# Altium PCB FOC.PcbDoc
Units mil, origin at the board's own origin, x right, y up, seen from the top; angles counter-clockwise.
Board outline 3535.01 x 1960.01 mil, 2 copper layers (Top Layer, Bottom Layer), stack 21 mil thick; 64 components, 47 nets, 230 pads, 98 vias.
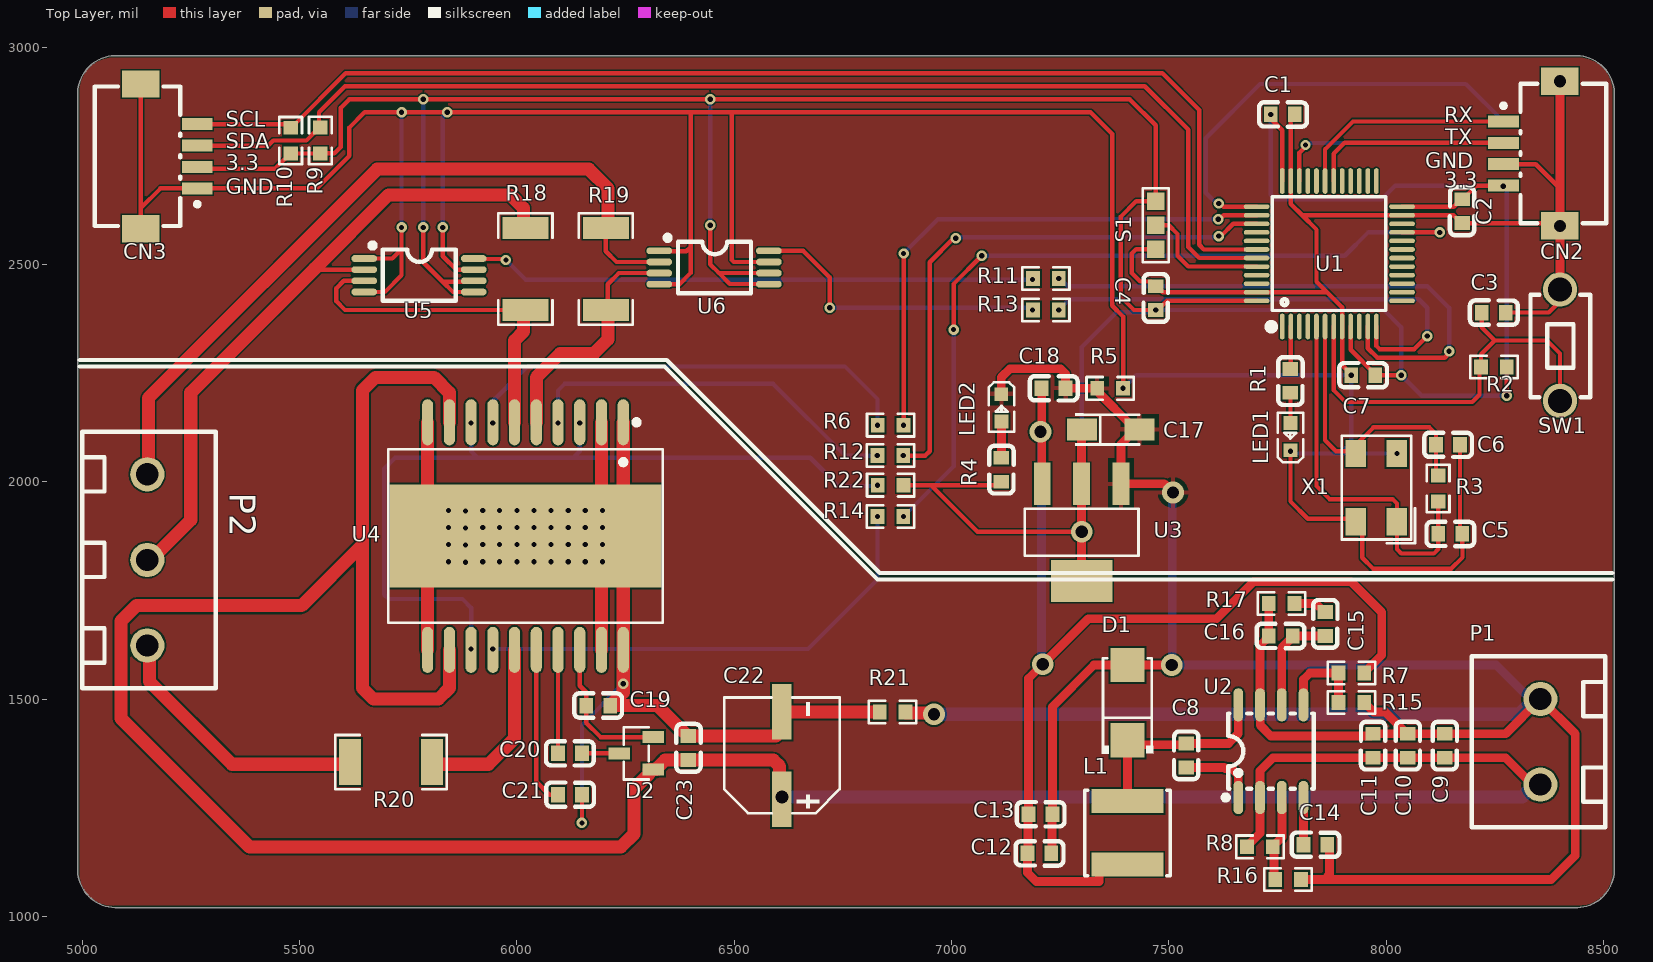
[diagram p0: Top Layer view]
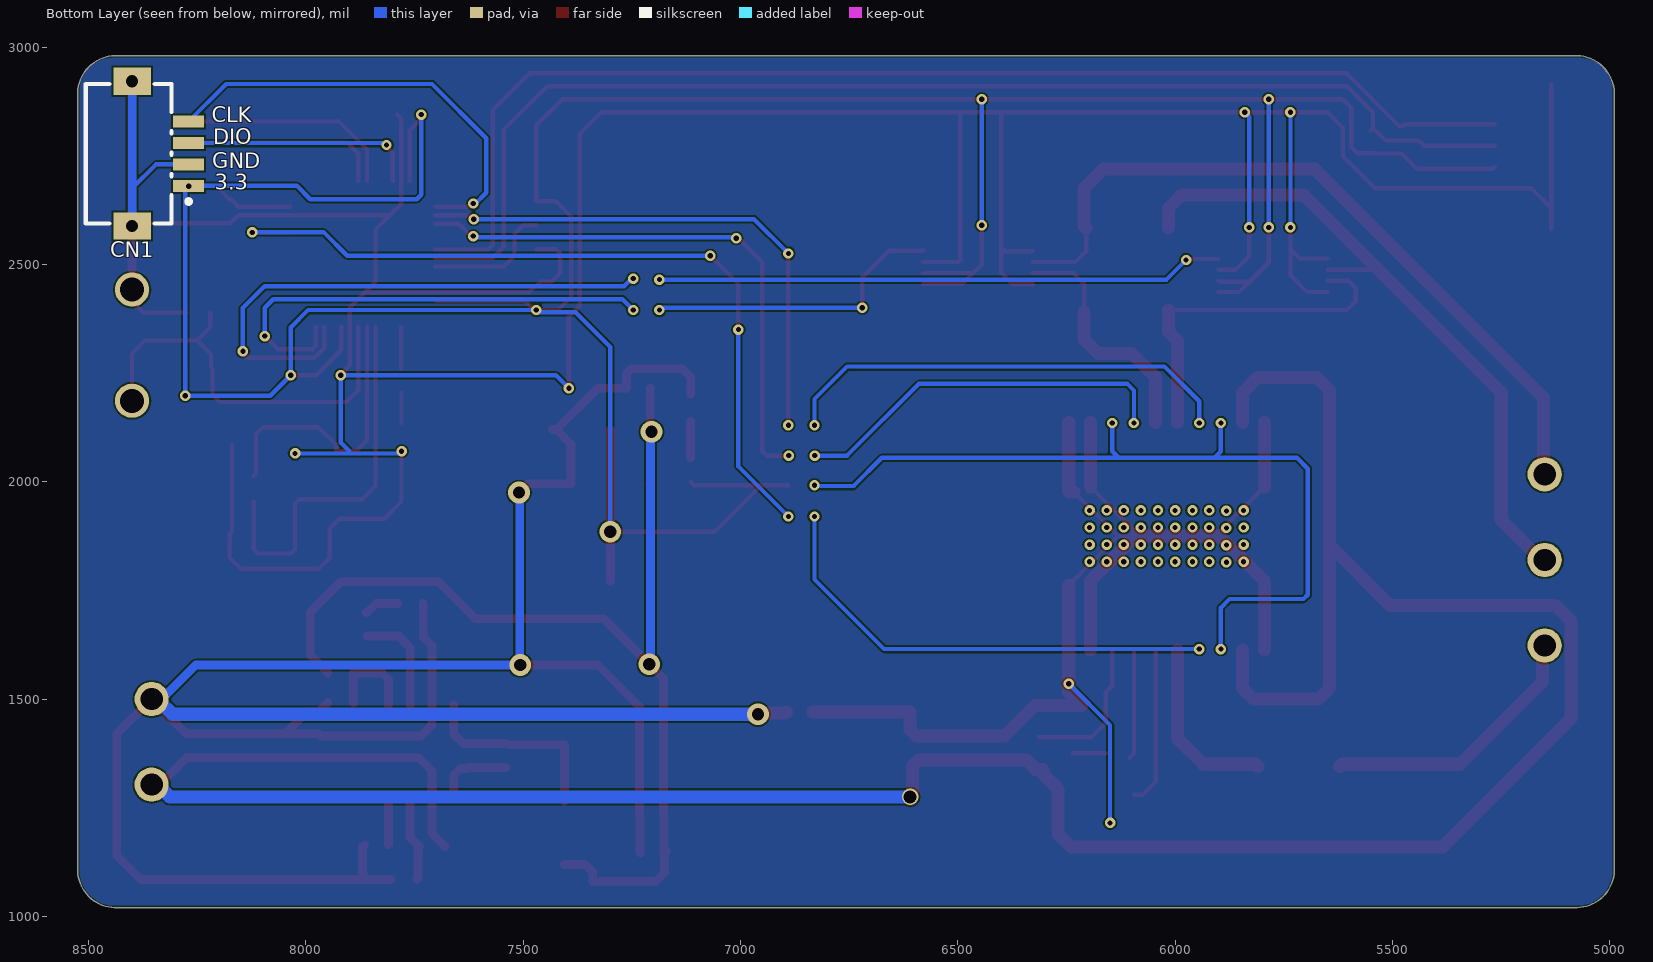
[diagram p1: Bottom Layer view, seen from below]

## Layer stack, top to bottom
Top Solder: solder mask 0.4, Solder Resist, Dk 3.5
Top Layer: signal copper 1.4
Dielectric 2: prepreg 2.8, PP-006, Dk 4.1
Dielectric 1: dielectric 12.6, FR-4, Dk 4.8
Dielectric 3: prepreg 2.8, PP-006, Dk 4.1
Bottom Layer: signal copper 1.4
Bottom Solder: solder mask 0.4, Solder Resist, Dk 3.5

## Board outline
4989.99,1105.01 4989.99,2894.74 cw(c5077.5,2892.5) 5075,2980 5075.01,2980.01 8439.74,2980.01 cw(c8437.5,2892.5) 8525,2895 8525.01,2894.99 8525.01,1105.26 cw(c8437.5,1107.5) 8440,1020 8439.99,1019.99 5075.26,1019.99 cw(c5077.5,1107.5)

## Design rules (kind name [scope] priority, off if disabled: settings)
Clearance [All] p1: gap=4 ignorepadtopadclearanceinfootprint=TRUE
PolygonConnect [All] p1: connectstyle=Relief reliefconductorwidth=10 reliefentries=4 polygonreliefangle="90 Angle" airgapwidth=10
RoutingVias [All] p1: holewidth=10 width=20 viastyle="Through Hole" minholewidth=10 minwidth=10 maxholewidth=28 maxwidth=50
SolderMaskExpansion [All] p1: expansion=4
Width [All] p1: maxlimit=100 minlimit=10 preferedwidth=10 minimp=50.000000 maximp=50.000000 favimp=50.000000
30 further rules are at their usual default settings.

## Classes and differential pairs
component class M_FOC: C19 C20 C21 C22 C23 D2 P2 R18 R19 R20 R21 U4 U5 U6
component class FOC: C1 C2 C3 C4 C5 C6 C7 C8 C9 C10 C11 C12 C13 C14 C15 C16 C17 C18 CN1 CN2 CN3 D1 L1 LED1 LED2 P1 R1 R2 R3 R4 R5 R6 R7 R8 R9 R10 R11 R12 R13 R14 R15 R16 R17 R22 S1 SW1 U1 U2 U3 X1

## Components (designator, comment, footprint, x,y, rotation, side; value= is the part's Value field where it differs from the comment)
C1 "22nF" C0603 7762.44,2845 r180 top
C2 "22nF" C0603 8175,2622.55 r90 top
C3 "22nF" C0603 8247.56,2389.14 r180 top
C4 "22nF" C0603 7470,2422.45 r270 top
C5 "22pF" C0603 8147.66,1879.89 r180 top
C6 "22pF" C0603 8142.56,2085 r180 top
C7 "22nF" C0603 7947.56,2245 r0 top
C8 "100nF" C0603 7540,1370 r270 top
C9 "4.7uF" C0603 8135,1392.56 r270 top
C10 "4.7uF" C0603 8050,1392.44 r270 top
C11 "100nF" C0603 7970,1392.56 r270 top
C12 "22uF" C0603 7202.44,1145 r180 top
C13 "22uF" C0603 7205,1235 r180 top
C14 "100nF" C0603 7837.44,1165 r180 top
C15 "1.2nF" C0603 7860.13,1672.56 r270 top
C16 "10pF" C0603 7757.44,1645 r0 top
C17 "10uF" CAP-SMD_L3.2-W1.6-RD 7366.39,2120 r180 top
C18 "10nF" C0603 7235,2215 r180 top
C19 "220nF" C0603 6187.44,1485 r0 top
C20 "10nF" C0603 6122.56,1374.89 r0 top
C21 "1uF" C0603 6122.44,1280 r180 top
C22 "100uF" CAP-SMD_BD6.3-L6.6-W6.6-RD 6610,1370 r270 top
C23 "100nF" C0603 6395,1387.44 r270 top
CN1 "GH1.25_4P" CONN-TH_4P-P1.25_HRS_DF13-4P-1.25H-21 8334.96,2754.6 r90 bottom
CN2 "GH1.25_4P" CONN-TH_4P-P1.25_HRS_DF13-4P-1.25H-21 8335,2755 r270 top
CN3 "GH1.25_4P" CONN-TH_4P-P1.25_HRS_DF13-4P-1.25H-21 5199.96,2748.66 r90 top
D1 "SS36" SMA_L4.3-W2.6-LS5.2-RD 7405,1491.62 r90 top
D2 "BAT54S_C916425" SOT-23-3_L2.9-W1.3-P1.90-LS2.4-BR 6275,1375 r0 top
L1 "6.8uH" IND-SMD_L5.0-W5.0_SWPA5040S 7404.99,1192.16 r270 top
LED1 "SML-D12U8WT86" LED0603-RD 7780.14,2103.52 r90 top
LED2 "SML-D12U8WT86" LED0603-RD 7115,2170 r270 top
P1 "WJ126V-5.0-2P" CONN-TH_WJ126V-5.0-2P 8355,1401.55 r180 top
P2 "WJ126V-5.0-3P" CONN-TH_3P-P5.00_WJ126V-5.0-3P 5150,1820.05 r90 top
R1 "330" C0603 7780,2231.96 r90 top
R2 "10K" R0603 8248.04,2264.14 r180 top
R3 "10K" R0603 8119.94,1984.29 r90 top
R4 "330" C0603 7115,2027.44 r270 top
R5 "0" R0603 7365.35,2215 r180 top
R6 "0" R0603 6860.35,2130 r0 top
R7 "62K" R0603 7920.35,1560 r0 top
R8 "330K" R0603 7709.65,1160 r180 top
R9 "10K" R0603 5548.03,2785 r270 top
R10 "10K" R0603 5480,2784.66 r270 top
R11 "0" R0603 7217.22,2467.25 r0 top
R12 "0" R0603 6859.65,2060 r0 top
R13 "0" R0603 7217.22,2395 r0 top
R14 "0" R0603 6859.65,1920 r0 top
R15 "10K" R0603 7920.35,1491.91 r180 top
R16 "68K" R0603 7774.65,1085 r180 top
R17 "30K" R0603 7759.64,1720 r0 top
R18 "0.1" R2010 6020,2489.14 r90 top
R19 "0.1" R2010 6205,2489.14 r90 top
R20 "0.1" R2010 5710.86,1355 r0 top
R21 "0" R0603 6864.65,1470 r0 top
R22 "0" R0603 6860.35,1991.97 r0 top
S1 "switch" switch 7470,2590 r90 top
SW1 "UK" SW-TH_L6.0-W3.5-P6.50 8400,2314.14 r90 top
U1 "STM32F103C8T6" LQFP-48_L7.0-W7.0-P0.50-LS9.0-BL 7869.43,2524.43 r0 top
U2 "TPS54331DR" SOIC-8_L5.0-W4.0-P1.27-LS6.0-BL 7735,1380 r0 top
U3 "AMS1117-3.3_C369933" SOT-223-4_L6.5-W3.5-P2.30-LS7.0-BR 7299.45,1883.39 r90 top
U4 "L6234PD013TR" POWERSO20_L15.9-W11.0-P1.27-LS14.2-BL-EP 6020,1875 r180 top
U5 "INA240A3PWR" TSSOP-8_L4.4-W3.0-P0.65-LS6.4-BL-2 5775,2475 r270 top
U6 "INA240A3PWR" TSSOP-8_L4.4-W3.0-P0.65-LS6.4-BL-2 6454,2492.8 r270 top
X1 "8MHz" CRYSTAL-SMD_4P-L5.0-W3.2-BL 7977.76,1986.26 r90 top

## Footprints (in the part's own frame and the unit in brackets; to place one, negate y for a bottom-side part, rotate by r counter-clockwise, add the part's x,y. Pads: shape width x height; smd on the part's side, far side on the other; paste and mask are expansions set on the pad)
C0603 [mm]
  rect 0.8x0.9 smd: 1(-0.7,0) 2(0.7,0)
  silkscreen extent -1.41,-0.71 1.39,0.72
CAP-SMD_BD6.3-L6.6-W6.6-RD [mm]
  rect 3.26x1.15 smd: 1(2.555,0) 2(-2.555,0)
  silkscreen extent -3.39,-3.38 3.36,3.38
CAP-SMD_L3.2-W1.6-RD [mil]
  rect 69.19x51.02 smd: 1(66.39,0) 2(-66.39,0)
  silkscreen extent -66,-37 81,37
CONN-TH_3P-P5.00_WJ126V-5.0-3P [mm]
  round 2 hole 1.3: 1(5,0) 2(-0.001,0) 3(-5,0)
  silkscreen extent -7.5,-4 7.5,3.8
CONN-TH_4P-P1.25_HRS_DF13-4P-1.25H-21 [mm]
  rect 0.7x1.8 smd: 1(-1.875,-1.65) 2(-0.625,-1.65) 3(0.625,-1.65) 4(1.875,-1.65)
  rect 1.6x2.2 smd: 5(4.225,1.65) 6(-4.225,1.65)
  silkscreen extent -4.07,-1.78 4.07,4.35
CONN-TH_WJ126V-5.0-2P [mm]
  round 2 hole 1.3: 1(0,2.501) 2(0,-2.501)
  silkscreen extent -3.8,-5 4,5
CRYSTAL-SMD_4P-L5.0-W3.2-BL [mm]
  rect 1.6x1.2 smd: 1(-2,-1.2) 2(2,-1.2) 3(2,1.2) 4(-2,1.2)
  silkscreen extent -3.26,-2.26 3.03,2.03
IND-SMD_L5.0-W5.0_SWPA5040S [mm]
  rect 1.4x4.2 smd: 1(-1.85,0) 2(1.85,0)
  silkscreen extent -2.5,-2.5 2.5,2.5
LED0603-RD [mm]
  rect 0.8x0.8 smd: 1(-0.799,-0.003) 2(0.799,0.004)
  silkscreen extent -1.49,-0.75 1.39,0.76
LQFP-48_L7.0-W7.0-P0.50-LS9.0-BL [mm]
  oval 0.27x1.5 smd: 1(-2.75,-4.25) 2(-2.25,-4.25) 3(-1.75,-4.25) 4(-1.25,-4.25) 5(-0.75,-4.25) 6(-0.25,-4.25) 7(0.25,-4.25) 8(0.75,-4.25) 9(1.25,-4.25) 10(1.75,-4.25) 11(2.25,-4.25) 12(2.75,-4.25) 25(2.75,4.25) 26(2.25,4.25) 27(1.75,4.25) 28(1.25,4.25) 29(0.75,4.25) 30(0.25,4.25) 31(-0.25,4.25) 32(-0.75,4.25) 33(-1.25,4.25) 34(-1.75,4.25) 35(-2.25,4.25) 36(-2.75,4.25)
  oval 1.5x0.27 smd: 13(4.25,-2.75) 14(4.25,-2.25) 15(4.25,-1.75) 16(4.25,-1.25) 17(4.25,-0.75) 18(4.25,-0.25) 19(4.25,0.25) 20(4.25,0.75) 21(4.25,1.25) 22(4.25,1.75) 23(4.25,2.25) 24(4.25,2.75) 37(-4.25,2.75) 38(-4.25,2.25) 39(-4.25,1.75) 40(-4.25,1.25) 41(-4.25,0.75) 42(-4.25,0.25) 43(-4.25,-0.25) 44(-4.25,-0.75) 45(-4.25,-1.25) 46(-4.25,-1.75) 47(-4.25,-2.25) 48(-4.25,-2.75)
  silkscreen extent -3.59,-4.46 3.3,3.34
POWERSO20_L15.9-W11.0-P1.27-LS14.2-BL-EP [mm]
  oval 0.651x2.694 smd: 1(-5.715,-6.648) 2(-4.445,-6.648) 3(-3.175,-6.648) 4(-1.905,-6.648) 5(-0.635,-6.648) 6(0.635,-6.648) 7(1.905,-6.648) 8(3.175,-6.648) 9(4.445,-6.648) 10(5.715,-6.648) 11(5.715,6.648) 12(4.445,6.648) 13(3.175,6.648) 14(1.905,6.648) 15(0.635,6.648) 16(-0.635,6.648) 17(-1.905,6.648) 18(-3.175,6.648) 19(-4.445,6.648) 20(-5.715,6.648)
  rect 15.9x6 smd: 21(0,0)
  silkscreen extent -8.03,-6.8 8.03,5.07
R0603 [mil]
  rect 31.75x34.02 smd: 1(-29.66,0) 2(29.65,0)
  silkscreen extent -55,-26 55,26
R2010 [mm]
  rect 1.283x2.7 smd: 1(-2.391,0) 2(2.391,0)
  silkscreen extent -3.26,-1.58 3.26,1.58
SMA_L4.3-W2.6-LS5.2-RD [mm]
  rect 2x2 smd: 1(-2.2,0) 2(2.2,0)
  silkscreen extent -2.98,-1.5 2.6,1.5
SOIC-8_L5.0-W4.0-P1.27-LS6.0-BL [mil]
  oval 22.38x76.78 smd: 1(-75,-106.5) 2(-25,-106.5) 3(25,-106.5) 4(75,-106.5) 5(75,106.5) 6(25,106.5) 7(-25,106.5) 8(-75,106.5)
  silkscreen extent -110,-112 98,87
SOT-23-3_L2.9-W1.3-P1.90-LS2.4-BR [mm]
  rect 1.25x0.7 smd: 1(1,-0.95) 2(1,0.95) 3(-1,0)
  silkscreen extent -0.73,-1.53 0.73,1.53
SOT-223-4_L6.5-W3.5-P2.30-LS7.0-BR [mm]
  rect 2.47x0.98 smd: 1(2.835,-2.3) 2(2.835,0) 3(2.835,2.3)
  rect 2.47x3.6 smd: 4(-2.835,0)
  silkscreen extent -1.37,-3.33 1.37,3.33
SW-TH_L6.0-W3.5-P6.50 [mm]
  round 2 hole 1.4: 1(-3.25,0) 2(3.25,0)
  silkscreen extent -3.05,-1.78 2.95,1.72
switch [mil]
  rect 40x40 smd: 0(0,0) 1(-55,0) 2(55,0)
  silkscreen extent -85,-30 85,30
TSSOP-8_L4.4-W3.0-P0.65-LS6.4-BL-2 [mm]
  oval 0.4x1.5 smd: 1(-0.975,-3.2) 2(-0.325,-3.2) 3(0.325,-3.2) 4(0.975,-3.2) 5(0.975,3.2) 6(0.325,3.2) 7(-0.325,3.2) 8(-0.975,3.2)
  silkscreen extent -1.89,-2.87 1.5,2.16

## Part data
C1 C2 C3 C4 C5 C6 C7 C8 C9 C10 C11 C12 C13 C14 C15 C16 C18 C19 C20 C21 C23: BOM_JLCPCB Part Class="Basic Part", BOM_Manufacturer=YAGEO, BOM_Manufacturer Part=CC0805KRX7R9BB104, BOM_Supplier=LCSC, BOM_Supplier Part=C49678, nameAlias=Capacitance, spicePre=C, spiceSymbolName=CC0805KRX7R9BB104
C17: "tan", BOM_JLCPCB Part Class="Extended Part", BOM_Manufacturer=Xiangyee, BOM_Manufacturer Part=CA45-A016K106T, BOM_Supplier=LCSC, BOM_Supplier Part=C119051, Contributor=LCSC, nameAlias=Capacitance, spicePre=C, spiceSymbolName=CA45-A016K106T
C22: "电解电容", BOM_JLCPCB Part Class="Extended Part", BOM_Manufacturer=ROQANG, BOM_Manufacturer Part=RVE1V101M0607, BOM_Supplier=LCSC, BOM_Supplier Part=C99837, nameAlias=Capacitance, spicePre=C, spiceSymbolName=RVE1V101M0607-C99837
CN1 CN2 CN3: BOM_Manufacturer=HRS(广濑), BOM_Manufacturer Part=DF13-4P-1.25H(21), BOM_Supplier=LCSC, BOM_Supplier Part=C597872, Contributor=LCSC, spicePre=C, spiceSymbolName=DF13-4P-1.25H(21)
D1: BOM_JLCPCB Part Class="Extended Part", BOM_Manufacturer=MDD, BOM_Manufacturer Part=SS36, BOM_Supplier=LCSC, BOM_Supplier Part=C16015, spicePre=D, spiceSymbolName=SS36
D2: library part BAT54S, "肖特基", BOM_JLCPCB Part Class="Extended Part", BOM_Manufacturer=JSMSEMI, BOM_Manufacturer Part=BAT54S, BOM_Supplier=LCSC, BOM_Supplier Part=C916425, Contributor=LCSC, spicePre=D, spiceSymbolName=BAT54S_C916425
L1: BOM_JLCPCB Part Class="Extended Part", BOM_Manufacturer=Sunlord, BOM_Manufacturer Part=SWPA5040S6R8M, BOM_Supplier=LCSC, BOM_Supplier Part=C36411, nameAlias=Inductance, spicePre=L, spiceSymbolName=SWPA5040S6R8M
LED1 LED2: library part LED_1, "0603", BOM_JLCPCB Part Class="Extended Part", BOM_Manufacturer=ROHM(罗姆), BOM_Manufacturer Part=SML-D12U8WT86, BOM_Supplier=LCSC, BOM_Supplier Part=C510027, Contributor=LCSC, spicePre=L, spiceSymbolName=SML-D12U8WT86
P1 P2: BOM_JLCPCB Part Class="Extended Part", BOM_Manufacturer=ReliaPro, BOM_Supplier=LCSC, spicePre=P
  P1: BOM_Manufacturer Part=WJ126V-5.0-2P, BOM_Supplier Part=C8404, spiceSymbolName=WJ126V-5.0-2P
  P2: BOM_Manufacturer Part=WJ126V-5.0-3P, BOM_Supplier Part=C8401, spiceSymbolName=WJ126V-5.0-3P
R1 R2 R3 R4 R7 R9 R10 R15 R16 R17 R18 R19 R20: BOM_JLCPCB Part Class="Basic Part", BOM_Manufacturer=UniOhm, BOM_Manufacturer Part=0805W8F1002T5E, BOM_Supplier=LCSC, BOM_Supplier Part=C17414, nameAlias="Resistance (Ohms)", spicePre=R, spiceSymbolName=0805W8F1002T5E
R5 R6 R11 R12 R13 R14 R21 R22: "0欧电阻", BOM_JLCPCB Part Class="Basic Part", BOM_Manufacturer=UniOhm, BOM_Manufacturer Part=0805W8F1002T5E, BOM_Supplier=LCSC, BOM_Supplier Part=C17414, nameAlias="Resistance (Ohms)", spicePre=R, spiceSymbolName=0805W8F1002T5E
R8: "R0603", BOM_JLCPCB Part Class="Basic Part", BOM_Manufacturer=UniOhm, BOM_Manufacturer Part=0603WAF3303T5E, BOM_Supplier=LCSC, BOM_Supplier Part=C23137, nameAlias="Resistance (Ohms)", spicePre=R, spiceSymbolName=0603WAF3303T5E
S1: library part SWITCH
SW1: library part UK-B0205G43-DP25Y, BOM_JLCPCB Part Class="Extended Part", BOM_Manufacturer=USAKRO, BOM_Manufacturer Part=UK-B0205G43-DP25Y, BOM_Supplier=LCSC, BOM_Supplier Part=C493223, Contributor=LCSC, spicePre=S, spiceSymbolName=UK-B0205G43-DP25Y
U1: BOM_JLCPCB Part Class="Basic Part", BOM_Manufacturer=STMicroelectronics, BOM_Manufacturer Part=STM32F103C8T6, BOM_Supplier=LCSC, BOM_Supplier Part=C8734, spicePre=U, spiceSymbolName=STM32F103C8T6, timeStamp=1455028086
U2: "电源芯片", BOM_JLCPCB Part Class="Basic Part", BOM_Manufacturer=TI, BOM_Manufacturer Part=TPS54331DR, BOM_Supplier=LCSC, BOM_Supplier Part=C9865, spicePre=U, spiceSymbolName=TPS54331DR
U3: BOM_JLCPCB Part Class="Extended Part", BOM_Manufacturer=KEXIN, BOM_Manufacturer Part=AMS1117-3.3, BOM_Supplier=LCSC, BOM_Supplier Part=C369933, Contributor=LCSC, spicePre=U, spiceSymbolName=AMS1117-3.3_C369933
U4: "三路H桥", BOM_JLCPCB Part Class="Extended Part", BOM_Manufacturer=STMicroelectronics, BOM_Manufacturer Part=L6234PD013TR, BOM_Supplier=LCSC, BOM_Supplier Part=C77581, spicePre=U, spiceSymbolName=L6234PD013TR
U5 U6: BOM_JLCPCB Part Class="Extended Part", BOM_Manufacturer=TI(德州仪器), BOM_Manufacturer Part=INA240A3PWR, BOM_Supplier=LCSC, BOM_Supplier Part=C544538, Contributor=LCSC, spicePre=U, spiceSymbolName=INA240A3PWR
X1: BOM_Manufacturer="TXC Corp", BOM_Manufacturer Part=7B08070003, BOM_Supplier=LCSC, BOM_Supplier Part=C337573, Contributor=LCSC, nameAlias=Frequency, spicePre=X, spiceSymbolName=7B08070003

## Via types
v1: diameter 24, hole 12, Top Layer to Bottom Layer, 89 vias
v2: diameter 50, hole 28, Top Layer to Bottom Layer, 8 vias
v3: diameter 38, hole 30, Top Layer to Bottom Layer, 1 vias

## Nets (pads, with @x,y where several pads share a name; then routed paths per layer and width w, separated by ;. In a path a pad name is that pad's centre, name@x,y a point inside that pad or via, vN(x,y) a via of type N, cw(c..) or ccw(c..) an arc to the next point about the centre after c; other vN are vias at no path point)
ADC1: R11.2 U1.11 | length 1279.7
  Top Layer w10: U1.11 7958.01,2306.99 7980,2285 8135,2285 v1@8145,2295
  Bottom Layer w10: v1@7250.56,2467.25 7267.81,2450 7320,2450 8095,2450 8145,2400 v1(8145,2300) v1@8140,2295
  other v1: 7246.88,2467.25
ADC2: R13.2 U1.12 | length 1109.3
  Top Layer w10: U1.12 7977.71,2312.29 7985,2305 8065,2305 v1(8095,2335)
  Bottom Layer w10: v1(7246.88,2395) 7271.88,2420 7320,2420 8075,2420 8095,2400 v1(8095,2335)
BOOT0: S1.0 U1.44 | length 300.8
  Top Layer w10: S1.0 7500,2590 7520,2570 7520,2520 7545,2495 7702.02,2495 U1.44
GND: C9.1 C10.1 C11.1 C12.1 C13.1 C14.1 C16.1 C17.2 C18.1 D1.2 LED2.1 P1.2 R5.2 R15.1 R16.1 R17.1 R21.2 U2.7 U3.1 | length 6343.2
  Top Layer w20: LED2.1 7115,2201.61 7115,2240 7135,2260 7250.84,2260 7262.56,2248.28 C18.1 7328.69,2215 C17.2@7423.69,2120 ; C12.1 7231.28,1146.28 7231.28,1233.72 C13.1 7232.56,1482.56 7328.23,1578.23 D1.2 v2(7506.77,1578.23) ; C17.2 C17.2@7423.69,2120 ; v2(7510,1975) 7490,1995 U3.1 7390,2086.31 C17.2@7423.69,2120 ; R17.1 7729.94,1719.95 C16.1 C16.1 7729.89,1643.03 7710,1623.14 U2.7 7710.45,1486.05 7710.45,1439.55 7735,1415 7964.89,1415 C11.1 7970.06,1420.06 C10.1@8047.98,1420.06 ; R16.1 7858.28,1085 ; C14.1 7870,1160 7870,1096.72 7858.28,1085 ; R15.1 7950,1490.78 7955.88,1484.9 7957.01,1484.9 7971.91,1470 7998.03,1470 C10.1@8047.98,1420.06 ; 7858.28,1085 8380,1085 8435,1140 8435,1420 P1.2 8275.11,1420.11 C9.1 8134.94,1420.06 8050.06,1420.06 C10.1 8048.03,1420 C10.1@8047.98,1420.06
  Top Layer w30: R21.2 6894.31,1468.87 6895.19,1467.99 6957.01,1467.99 v2(6960,1465)
  Bottom Layer w20: v2(7510,1975) 7508.38,1973.38 7508.38,1579.85 v2(7506.77,1578.23) 8253.58,1578.23 P1.2@8336.81,1495 ; P1.2@8350,1495 P1.2
  Bottom Layer w30: v2(6960,1465) 8306.81,1465 8336.81,1495 P1.2@8350,1495
I2C1_SCL: CN3.4 R10.1 U1.42 | length 2838.9
  Top Layer w10: CN3.4 5471.83,2822.48 5475.91,2818.4 5485.22,2818.4 5606.82,2940 7485,2940 7570,2855 7570,2545 7580.73,2534.27 U1.42
I2C1_SDA: CN3.3 R9.1 U1.43 | length 2844.7
  Top Layer w10: CN3.3 5428.28,2773.28 5440,2785 5516.03,2785 5534.81,2803.78 5536.02,2803.78 5545,2812.76 R9.1@5545,2813.97 ; R9.1@5550,2808.97 R9.1@5545,2813.97 ; U1.43 7570.41,2514.59 7545,2540 7545,2810 7445,2910 5605,2910 5545,2850 R9.1@5545,2813.97
I_X: R11.1 U5.8 | length 1305.9
  Top Layer w10: U5.8 5902.1,2512.3 5972.7,2512.3 v1(5975,2510)
  Bottom Layer w10: v1(5975,2510) 6020,2465 v1(7186.88,2465)
I_Y: R13.1 U6.8 | length 704.3
  Top Layer w10: U6.8 6658.8,2531.2 6720,2470 v1(6720,2400)
  Bottom Layer w10: v1(6720,2400) 7181.88,2400 v1(7186.88,2395)
M_EN: R22.1 U4.3 U4.8 U4.13 | length 1942.9
  Bottom Layer w10: v1(5895,1615) 5895,1710 5875,1730 5705,1730 5695,1740 5695,2030 5720,2055 5910,2055 ; v1(5895,2135) 5895,2070 5910,2055 ; v1(6145,2135) 6145,2070 6130,2055 ; v1(6830,1991.97) 6828.03,1990 6740,1990 6675,2055 6130,2055 ; 5910,2055 6130,2055
M_IN1: R6.1 U4.7 | length 1059.2
  Bottom Layer w10: v1(5945,2135) 5945,2185 6025,2265 6755,2265 6830,2190 v1(6830,2130)
M_IN2: R12.1 U4.4 | length 890.9
  Bottom Layer w10: v1(6095,2135) 6090,2135 6095,2140 6095,2210 6110,2225 6590,2225 6755,2060 v1(6829.31,2060)
M_IN3: R14.1 U4.14 | length 1096.3
  Bottom Layer w10: v1(5945,1615) 6670,1615 6830,1775 v1(6830,1920)
M_OUT1: R18.1 U4.6 U5.3 | length 810.1
  Top Layer w10: U5.3 5602.2,2462.2 5585,2445 5585,2415 5605,2395 R18.1@6015.25,2395 ; U4.6@5992.29,2139.43 U4.6
  Top Layer w30: U4.6 5995,2325 6015.25,2345.25 R18.1@6015.25,2395
M_OUT2: R19.1 U4.5 U6.3 | length 561
  Top Layer w10: R19.1@6210,2390 6209.14,2390.86 6209.14,2454.14 6235,2480 U6.3
  Top Layer w30: U4.5 6045,2240 6100,2295 6177.43,2295 6210,2327.57 R19.1@6210,2390
M_OUT3: R20.2 U4.15 | length 415.2
  Top Layer w30: R20.2@5810,1345 5815,1350 5935,1350 5995,1410 U4.15
M_X: P2.2 R18.2 U5.2 | length 1555.2
  Top Layer w10: 5535,2490 5537.2,2487.8 U5.2
  Top Layer w30: P2.2@5155,1816.8 5250,1911.8 5250,2205 5535,2490 5705,2660 5985,2660 6015.25,2629.75 R18.2@6015.25,2583.29
M_Y: P2.1 R19.2 U6.2 | length 1753.8
  Top Layer w10: R19.2 6205,2530 6229.4,2505.6 U6.2
  Top Layer w30: P2.1@5155,2013.7 5152.5,2016.2 5152.5,2192.5 5679,2719 6166,2719 6210,2675 6210,2588.29 R19.2
M_Z: P2.3 R20.1 | length 627.5
  Top Layer w30: P2.3@5155,1620 5155,1540 5345,1350 5616.71,1350 R20.1@5621.71,1345
NetC8_1: C8.1 D1.1 L1.1 U2.8 | length 451.4
  Top Layer w20: L1.1 7405,1395 C8.1@7530.59,1395 ; C8.1 7637.56,1397.56 7660,1420 U2.8
NetC8_2: C8.2 U2.1 | length 178.7
  Top Layer w20: C8.2 7627.56,1342.44 7630,1340 7645,1340 7660,1325 U2.1
NetC14_2: C14.2 U2.4 | length 108.5
  Top Layer w20: C14.2 7809.94,1165.06 7809.94,1273.44 U2.4
NetC15_1: C15.1 R17.2 | length 81.2
  Top Layer w20: R17.2 7838.28,1720 7858.17,1700.11 C15.1 C15.1@7861.65,1698.6
NetC15_2: C15.2 C16.2 U2.6 | length 244
  Top Layer w20: U2.6 7760,1618.03 7785,1643.03 C16.2 C15.2
NetC19_1: C19.1 D2.2 U4.18 | length 342.4
  Top Layer w10: U4.18 6145,1530.75 6159.89,1515.86 C19.1 6159.89,1445.11 6192.6,1412.4 D2.2
NetC20_1: C20.1 U4.17 | length 252.4
  Top Layer w10: U4.17 C20.1 C20.1@6104.89,1365
NetC20_2: C20.2 D2.3 | length 75.6
  Top Layer w10: C20.2@6160,1375 D2.3
NetC21_2: C21.2 U4.16 | length 365.6
  Top Layer w10: U4.16 6045,1310 6075,1280 C21.2
NetLED1_2: LED1.2 R1.1 | length 69.6
  Top Layer w10: R1.1@7779.86,2204.26 R1.1 LED1.2
NetLED2_2: LED2.2 R4.1 | length 83.6
  Top Layer w20: R4.1 7115.07,2055.07 LED2.2 LED2.2
NetR7_1: R7.1 R15.2 U2.5 | length 213.5
  Top Layer w20: U2.5 7810,1545 7825,1560 R7.1 R15.2
NetR8_1: R8.1 R16.2 U2.3 | length 199.8
  Top Layer w20: R16.2 7742.15,1087.85 7742.15,1157.15 R8.1 7739.31,1161.13 7760.45,1182.28 7760.45,1273.05 U2.3
OSC_IN: C5.2 R3.1 U1.5 X1.1 | length 886.8
  Top Layer w10: U1.5 7839.9,1990.1 7870,1960 8015,1960 8025,1950 8025,1882.52 8025,1845 8035,1835 8110,1835 8120.11,1845.11 8120.11,1883.8 8120.11,1954.47 R3.1
OSC_OUT: C6.2 R3.2 U1.6 X1.3 | length 670.4
  Top Layer w10: U1.6 7859.6,2095.4 7885,2070 7925.51,2070 X1.3 7930.51,2084.65 7970.86,2125 8100,2125 8115,2110 C6.2 8115,2018.89 R3.2
PC13: R1.2 U1.2 | length 98
  Top Layer w10: R1.2 7780.86,2260.37 U1.2
PGND: C19.2 C21.1 C22.2 C23.1 R21.1 U4.1 U4.2 U4.10 U4.11 U4.19 U4.20 U4.21 | length 3520.8
  Top Layer w10: U4.21@5795,1761.89 5845.94,1812.84 5884.72,1851.61 5908.11,1875 5885.9,1897.2 5845.94,1937.17 U4.21@5795,1988.11 ; U4.21@6081.89,1875 U4.21@6195,1988.11 ; U4.21@6091.89,1875 U4.21@6131.89,1875 ; v1(6150,1215) C21.1 ; U4.21@6245,1761.89 6194.05,1812.84 6154.68,1852.21 U4.21@6131.89,1875 ; U4.21@6245,1988.11 6233.44,1976.56 6194.06,1937.16 6154.69,1897.8 U4.21@6131.89,1875
  Top Layer w30: U4.11 5795,1761.89 5795,1771.89 5840.94,1817.84 5879.72,1856.61 5898.11,1875 5908.11,1875 U4.21 6081.89,1875 6091.89,1875 6114.99,1851.89 6154.36,1812.53 6195,1771.89 U4.19 ; U4.21@5795,1988.11 U4.10 ; U4.21@6195,1988.11 U4.2 ; U4.21@6233.44,1976.56 6243.44,1976.56 6245,1978.11 6245,1988.11 U4.1 ; U4.21@6245,1761.89 U4.20 v1(6245,1535) 6245,1515 C19.2 6323.03,1485 6393.03,1415 C23.1 6595.94,1415 6610,1429.06 C22.2 6610.59,1470 R21.1
  Bottom Layer w10: v1(6150,1215) 6150,1440 v1(6245,1535)
  other v1: 5882.2,1814.77 5842.83,1815.95 5921.57,1815.95 5960.34,1815.95 6000.31,1815.95 6039.68,1815.95 6079.05,1815.95 6118.42,1815.95 6157.79,1815.95 6197.16,1815.95 5882.2,1854.13 5842.83,1855.32 5921.57,1855.32 5960.34,1855.32 6000.31,1855.32 6039.68,1855.32 6079.05,1855.32 6118.42,1855.32 6157.79,1855.32 6197.16,1855.32 5882.2,1893.5 5842.83,1894.69 5921.57,1894.69 5960.34,1894.69 6000.31,1894.69 6039.68,1894.69 6079.05,1894.69 6118.42,1894.69 6157.79,1894.69 6197.16,1894.69 5882.2,1932.87 5842.83,1934.06 5921.57,1934.06 5960.34,1934.06 6000.31,1934.06 6039.68,1934.06 6079.05,1934.06 6118.42,1934.06 6157.79,1934.06 6197.16,1934.06
PWM1: R6.2 U1.38 | length 1243.6
  Top Layer w10: v1(6890,2130) v1(6890,2525) ; v1(7614.01,2604.01) 7617.79,2604.01 7626.8,2613.01 U1.38
  Bottom Layer w10: v1(6890,2525) 6969.01,2604.01 v1(7614.01,2604.01)
PWM2: R12.2 U1.39 | length 1283.5
  Top Layer w10: v1(6889.31,2060) 6940,2060 6950,2070 6950,2505 v1@7005,2560 ; v1(7615,2565) 7620,2565 7648.33,2593.33 U1.39
  Bottom Layer w10: v1(7010,2560) 7012.5,2562.5 7612.5,2562.5 v1(7615,2565)
PWM3: R14.2 U1.21 | length 1832.3
  Top Layer w10: v1(7005,2350) 7005,2455 v1(7070,2520) ; U1.21 v1(8123.64,2573.64)
  Bottom Layer w10: v1(6890,1920) 7005,2035 v1(7005,2350) ; v1@7075,2520 7905,2520 7958.64,2573.64 v1(8123.64,2573.64)
RST: C3.2 R2.2 SW1.1 U1.7 | length 991.2
  Top Layer w10: U1.7 7879.27,2210.73 7906.77,2183.23 8198.23,2183.23 8215,2200 8215,2260.75 R2.2 8218.39,2293.39 8250,2325 ; C3.2@8218.39,2387.52 C3.2 8220,2355 8250,2325 ; SW1.1@8400,2185 SW1.1 8400,2295 8370,2325 8250,2325
SGND: C1.1 C2.1 C3.1 C4.1 C5.1 C6.1 C7.1 CN1.2 CN1.5 CN1.6 CN2.3 CN2.5 CN2.6 CN3.1 CN3.5 CN3.6 LED1.1 R5.1 S1.1 SW1.2 U1.8 U1.23 U1.35 U1.47 U5.1 U5.4 U5.7 U6.1 U6.4 U6.7 X1.2 X1.4 | length 10231.8
  Top Layer w10: CN3.6 5135,2629.69 ; CN3.5 5135,2629.69 ; U5.4 5696.6,2436.6 5735,2475 5735,2535 ; U5.1 5713.4,2513.4 5735,2535 ; v1(5735,2585) 5735,2535 ; v1(5830,2585) 5830,2518.94 5861.14,2487.8 U5.7 ; U6.4 6374.4,2454.4 6400,2480 6400,2540 ; U6.1 6329.1,2530.1 6372.31,2530.1 6372.41,2530 6390,2530 6400,2540 ; U6.7 6499.4,2505.6 6495,2510 6495,2850 ; v1(7395,2215) 7395,2380 7370,2405 7370,2800 7320,2850 6495,2850 ; S1.1 7425,2535 7415,2525 7415,2480 7434.25,2460.75 7459.25,2460.75 C4.1 7471.97,2450 7486.12,2435.85 U1.47 7864.15,2435.85 ; LED1.1 7780.28,1954.72 7820,1915 7923.03,1915 X1.4 7945,1893.03 7945,1825 7970,1800 8150,1800 8175.86,1825.86 8175.86,1848.15 8175.22,1848.79 C5.1 8170.11,1885 C6.1 ; C1.1 7780,2835 7780,2825 7780.86,2824.14 U1.35 7780.86,2639.14 7806.99,2613.01 ; v1(7920,2245) 7920,2246.97 7898.97,2268 U1.8 7898.97,2401.03 7864.15,2435.85 ; CN2.3 8344.61,2730.39 8395,2680 8399.96,2680 ; C3.1 8374.14,2389.14 8395,2410 8395,2437.09 SW1.2 ; v2(8399.96,2588.66) 8393.63,2595 C2.1 8173.03,2595 8155.03,2613.01 U1.23 7806.99,2613.01 ; 5135,2629.69 5180.16,2674.84 CN3.1 5539.84,2674.84 5615,2750 5615,2815 5650,2850 v1(5735,2850) v1(5840,2850) 6400,2850 ; 6400,2540 6400,2850 ; 6400,2850 6495,2850 ; 7806.99,2613.01 7840,2580 7840,2460 7864.15,2435.85
  Top Layer w20: v2(8399.96,2921.34) 8399.96,2680 v2(8399.96,2588.66) 8400,2588.63 SW1.2
  Bottom Layer w10: v1(5735,2585) v1(5735,2850) ; v1(5830,2585) 5830,2840 v1(5840,2850) ; v1(7395,2215) 7425,2245 v1(7920,2245) 7920,2090 7900,2070 ; v1(7780,2070) 7785,2065 v1(8025,2065) ; CN1.2 8344.92,2730 8399.92,2675
  Bottom Layer w20: CN1.6 8399.92,2675 CN1.5
SVCC_3.3: C1.2 C2.2 C4.2 C7.2 C17.1 CN1.1 CN2.4 CN3.2 R2.1 R4.2 R9.2 R10.2 R22.2 S1.2 U1.9 U1.24 U1.36 U1.48 U3.2 U3.4 U5.5 U5.6 U6.5 U6.6 | length 8800.4
  Top Layer w10: CN3.2 5268.98,2720 5443.87,2720 5478.87,2755 R10.2 5547.68,2755 R9.2 5580.35,2755.34 5595,2770 5595,2860 5615,2880 v1(5785,2880) v1(6445,2880) 7410,2880 7470,2820 S1.2 7425,2645 7390,2610 7390,2425 7420.11,2394.89 C4.2 ; v1(5785,2585) 5785,2505 5829.8,2460.2 ; U5.5 5853.4,2436.6 5829.8,2460.2 ; U5.6 5899,2460.2 5829.8,2460.2 ; v1(6445,2590) 6445,2500 6465,2480 ; U6.5 6579.4,2455 6490,2455 6465,2480 ; U6.6 6465,2480 ; R22.2 6953.03,1991.97 ; R4.2 7107.08,1991.97 6953.03,1991.97 ; v2@7299.45,1875 7289.45,1885 7060,1885 6953.03,1991.97 ; C4.2@7474.89,2394.89 7496.16,2416.16 U1.48 ; C1.2@7734.89,2835.11 7761.16,2808.84 U1.36 ; U1.9 7918.64,2303.44 7975.11,2246.97 C7.2 v1(8035,2245) ; U1.24 8155.62,2632.7 8173.03,2650.11 C2.2 8176.97,2650.11 8208.04,2681.18 CN2.4 ; v1(8277.7,2197.7) R2.1
  Top Layer w20: U3.4 v2@7299.45,1875 ; v2@7299.45,1894.45 U3.2 7299.45,2119.45 C17.1
  Bottom Layer w10: v1(5785,2585) v1(5785,2880) ; v1(6445,2590) v1(6445,2880) ; v2(7300,1885) 7300,2310 7380,2390 v1@7470,2390 ; v1(7470,2395) 7995,2395 8035,2355 v1(8035,2245) 8082.3,2197.7 v1(8277.7,2197.7) 8277.7,2673.08 CN1.1 8020.78,2680.78 7990,2650 7745,2650 7734.61,2660.39 v1(7734.61,2844.61)
  other v1: 8269.61,2679.61
SVCC_5V: C12.2 C13.2 C18.2 L1.2 R7.2 U3.3 | length 2570.9
  Top Layer w20: C12.2@7169.89,1150 C12.2 ; C18.2 7208.17,2214.27 7208.17,1995.73 U3.3 ; L1.2 7357.56,1119.33 7340,1101.77 7340,1080 7195,1080 7174.89,1100.11 C12.2 ; R7.2 7950,1561.13 7990,1601.13 7990,1700 7920,1770 7695,1770 7610,1685 7315,1685 v2(7210,1580) 7177.44,1547.44 C13.2 7176.17,1233.72 7176.17,1146.28 C12.2
  Bottom Layer w20: v2(7205,2115) 7207.5,2112.5 7207.5,1582.5 v2(7210,1580)
SWCLK: CN1.4 U1.37 | length 1026.7
  Top Layer w10: v1(7615,2640) 7618.79,2640 7626.09,2632.7 U1.37
  Bottom Layer w10: v1@7612.5,2637.5 7585,2665 7585,2790 7710,2915 8183.42,2915 CN1.4
SWDIO: CN1.3 U1.34 | length 546
  Top Layer w10: U1.34 7800.53,2756.74 7814.61,2770.82 v1(7814.61,2774.61)
  Bottom Layer w10: v1(7814.61,2774.61) 7818.4,2774.61 7823,2779.21 CN1.3
UART1_RX: CN2.1 U1.31 | length 509.9
  Top Layer w10: U1.31 7859.6,2764.6 7923.82,2828.82 CN2.1
UART1_TX: CN2.2 U1.30 | length 463.8
  Top Layer w10: U1.30 7879.27,2754.27 7904.6,2779.6 CN2.2
VIN: C9.2 C10.2 C11.2 C22.1 C23.2 D2.1 P1.1 R8.2 U2.2 U4.9 U4.12 | length 6640.2
  Top Layer w20: R8.2 7680,1161.13 7710,1191.13 U2.2 7710,1335 7740,1365 C11.2 7970.06,1364.94 8049.94,1364.94 C10.2 8050.06,1364.94 8134.94,1364.94 C9.2 8275,1365 8336.9,1303.1 P1.1
  Top Layer w30: U4.12 5845,1525 5820,1500 5670,1500 5645,1525 5645,1855 ; U4.9 5845,2205 5810,2240 5675,2240 5645,2210 5645,1855 ; C22.1 6605,1274.41 6605,1345 6590.11,1359.89 C23.2 6341.55,1359.89 6323.97,1342.32 6323.97,1338.82 6322.75,1337.6 D2.1 6305.98,1337.6 6304.76,1336.38 6304.76,1327.99 6270,1293.23 6270,1190 6240,1160 5385,1160 5090,1455 5090,1680 5125,1715 5505,1715 5645,1855
  Bottom Layer w30: v3(6610,1275) 8313.71,1275 8341.81,1303.1 P1.1
pads on no net: U1.1 U1.3 U1.4 U1.10 U1.13 U1.14 U1.15 U1.16 U1.17 U1.18 U1.19 U1.20 U1.22 U1.25 U1.26 U1.27 U1.28 U1.29 U1.32 U1.33 U1.40 U1.41 U1.45 U1.46

## Polygon pours and split planes (outlines as drawn)
no net on Bottom Layer (solid, pour order 38): 8445,1025 ccw(c8439.83,1105) 8520,1105 8520,2895 ccw(c8443.21,2898.21) 8440,2975 5075,2975 ccw(c5070.16,2900) 4995,2900 4995,1105 ccw(c5075.17,1105) 5070,1025
no net on Bottom Layer (solid, pour order 36): 8560,2955
no net on Bottom Layer (solid, pour order 32): 5005,2900
no net on Bottom Layer (solid, pour order 22): 4995,2890
no net on Bottom Layer "Bottom Layer-No Net 1" (solid, pour order 6): 4995,2890
no net on Top Layer (solid, pour order 41): 6340,2265 6830,1775 8520,1775 8520,1095 cw(c8442.5,1102.5) 8450,1025 5080,1025 cw(c5070.59,1100) 4995,1100 4995,2265
GND on Top Layer (solid, pour order 40): 4995,2900 cw(c5070.6,2899.39) 5070,2975 8445,2975 cw(c8445,2900) 8520,2900 8520,1790 6835,1795 6340,2280 4995,2280
no net on Top Layer (solid, pour order 14): 4995,2900
no net on Top Layer (solid, pour order 8): 4995,2900

## Silkscreen, mask and mechanical layers (free items; w line width, h text height)
Top Overlay:
  lines w10: 4995,2265 6330,2265 6340,2265 6830,1775 8520,1775 ; 4995,2280 6345,2280 6835,1790 8520,1790
  text "RX" at 8133.62,2815 h60
  text "SCL" at 5330,2805 h60
  text "TX" at 8136.62,2765 h60
  text "SDA" at 5330,2755 h60
  text "GND" at 8090,2710 h60
  text "3.3" at 5330,2705 h60
  text "3.3" at 8133.62,2665 h60
  text "GND" at 5330,2650 h60
Bottom Overlay:
  text "CLK" at 8216.38,2815 h60
  text "DIO" at 8213.38,2765 h60
  text "GND" at 8215,2710 h60
  text "3.3" at 8210,2660 h60
Mechanical 1:
  the board outline again, w10

## Dimensions
8439.74,2980.01 to 8439.99,1019.99 on Drill Drawing
4989.99,1105.01 to 8525.01,1105.26 on Drill Drawing